# Allegro board HI2XXDK.brd
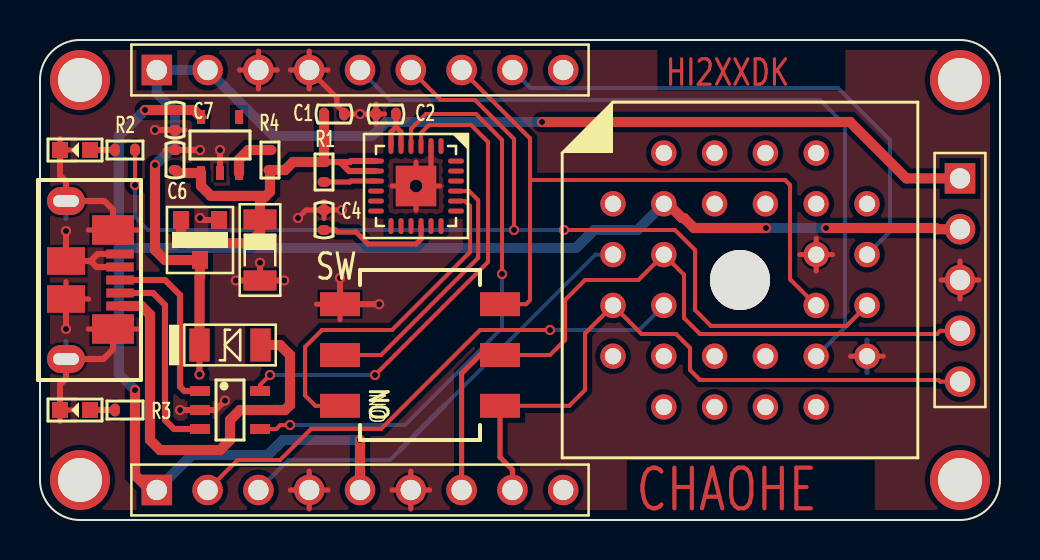
[diagram p0: board, top side]
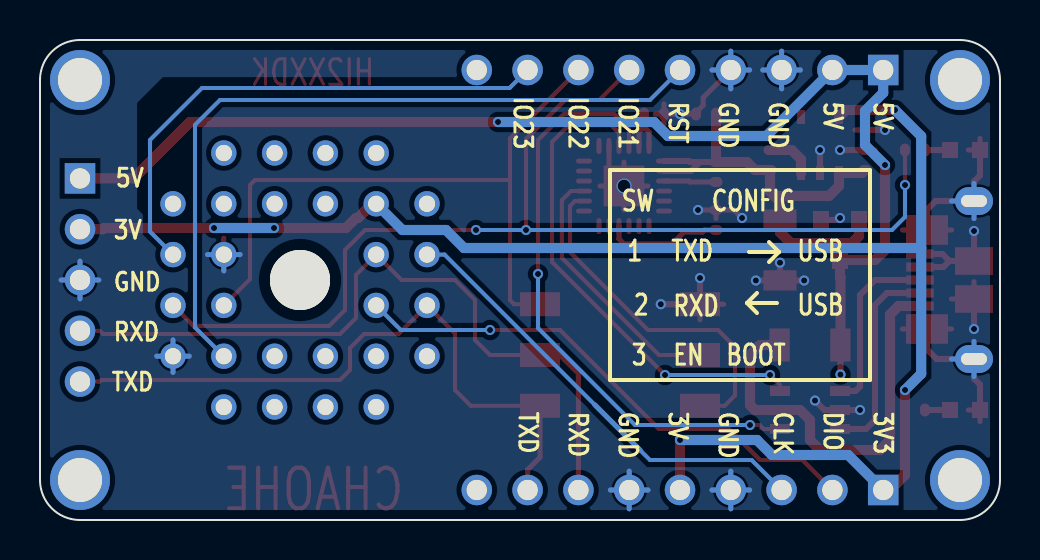
[diagram p1: board, bottom side, seen from below]

Outline 48 x 24 mm; copper layers: TOP, BOTTOM. Coordinates in mm from the lower left corner of the outline.
Outline path: 0,22 arc(0.59,23.41) 2,24 46,24 arc(47.41,23.41) 48,22 48,2 arc(47.41,0.59) 46,0 2,0 arc(0.59,0.59) 0,2 0,22

## Placement (name value [footprint] x y rotation side)
C1  4.7uF  [C0402_OB]  14.7 20.3 180 top
C2  0.1uF  [C0402_OB]  17.3 20.3 0 top
C4  4.7uF  [C0402_OB]  14.2 15 270 top
C5  10uF  [SC1206]  11 13.5 270 top
C6  0.1uF  [C0402_OB]  6.75 18 90 top
C7  1uF  [C0402_OB]  6.75 20 90 top
D1  1N5819  [SD1206]  9.5 8.75 0 top
D2  GREEN  [D0603]  1.75 18.5 180 top
D4  RED  [D0603]  1.75 5.5 180 top
H1  HOLE  [HOLE-2-MM]  46 2 0 top
H2  HOLE  [HOLE-2-MM]  2 22 0 top
H3  HOLE  [HOLE-2-MM]  46 22 0 top
H4  HOLE  [HOLE-2-MM]  2 2 0 top
J1  MINI-USB  [MICRO-USB-B-1051640001]  4 12 0 top
J2  PLCC28  [PLCC28_DIP]  35 12 0 top
J3  CONN PLUG 5  [HEADER1X5-2_54MM]  46 12 270 top
J5  HEADER 9  [HEADER1X9-2_54MM]  16 22.5 0 top
J6  HEADER 9  [HEADER1X9-2_54MM]  16 1.5 0 top
R1  4.7K  [R0402_OB]  14.2 17.4 90 top
R2  330R  [R0402_OB]  4.25 18.5 180 top
R3  330R  [R0402_OB]  4.25 5.5 180 top
R4  4.7K  [R0402_OB]  11.5 18 270 top
SW1  SW DIP-3  [SW_SMD_3P]  19 8.25 90 top
U1  CP2104  [QFN-24_4X4MM_P0_5]  18.8 16.7 270 top
U2  USBLC6-2SC6  [SOT23-6-0_95]  9.5 5.5 270 top
U3  AP2331TD  [SOT23-3-0_95]  8 14 180 top
U4  XC6210-3.0  [SOT23-5-0_95]  9 18.75 0 top

## Library data of the parts
C1 C2 C4-C7 = Capacity_Nonpolarity
D1 = diode
D2 D4 = LED
H1-H4 = HOLE
J1 = MICRO-USB_B
J2 = PLCC28_DIP
J3 = CONN PLUG 5
J5 J6 = HEADER 9
R1-R4 = Res
SW1 = SW DIP-3
U1 = CP2104
U2 = USBLC6-2SC6
U3 = AP2331TD
U4 = XC6210

## Footprints (pads in the part's own frame, mm; a bottom-side part is the same pattern mirrored in y, then rotated)
C0402_OB
  oval 0.5x0.65 smd: 1(-0.5,0) 2(0.5,0)
D0603
  rect 0.8x0.8 smd: 1(-0.75,0) 2(0.75,0)
HEADER1X5-2_54MM
  rect 1.524x1.524 hole 1.016: 1(-5.08,0)
  round 1.524 hole 1.016: 2(-2.54,0) 3(0,0) 4(2.54,0) 5(5.08,0)
HEADER1X9-2_54MM
  rect 1.524x1.524 hole 1.016: 1(-10.16,0)
  round 1.524 hole 1.016: 2(-7.62,0) 3(-5.08,0) 4(-2.54,0) 5(0,0) 6(2.54,0) 7(5.08,0) 8(7.62,0) 9(10.16,0)
HOLE-2-MM
  round 3 hole 2.2: 1(0,0)
MICRO-USB-B-1051640001
  rect 1.38x0.45 smd: 1(0,-1.3) 2(0,-0.65) 3(0,0) 4(0,0.65) 5(0,1.3)
  rect 2.1x1.475 smd: 6(-0.35,-2.45) 9(-0.35,2.5)
  oval 1.9x1.4 hole 1.3x0.6: 7(-2.7,3.95) 8(-2.7,-3.95)
  rect 1.9x1.375 smd: 10(-2.7,-0.95) 11(-2.7,0.95)
PLCC28_DIP
  round 3 hole 3.6 unplated: (0,0)
  round 1.27 hole 0.813: 1(1.27,3.81) 2(-1.27,6.35) 3(-1.27,3.81) 4(-3.81,6.35) 5(-6.35,3.81) 6(-3.81,3.81) 7(-6.35,1.27) 8(-3.81,1.27) 9(-6.35,-1.27) 10(-3.81,-1.27) 11(-6.35,-3.81) 12(-3.81,-6.35) 13(-3.81,-3.81) 14(-1.27,-6.35) 15(-1.27,-3.81) 16(1.27,-6.35) 17(1.27,-3.81) 18(3.81,-6.35) 19(6.35,-3.81) 20(3.81,-3.81) 21(6.35,-1.27) 22(3.81,-1.27) 23(6.35,1.27) 24(3.81,1.27) 25(6.35,3.81) 26(3.81,6.35) 27(3.81,3.81) 28(1.27,6.35)
QFN-24_4X4MM_P0_5
  oval 0.8x0.25 smd: 1(-2,1.25) 2(-2,0.75) 3(-2,0.25) 4(-2,-0.25) 5(-2,-0.75) 6(-2,-1.25) 13(2,-1.25) 14(2,-0.75) 15(2,-0.25) 16(2,0.25) 17(2,0.75) 18(2,1.25)
  oval 0.25x0.8 smd: 7(-1.25,-2) 8(-0.75,-2) 9(-0.25,-2) 10(0.25,-2) 11(0.75,-2) 12(1.25,-2) 19(1.25,2) 20(0.75,2) 21(0.25,2) 22(-0.25,2) 23(-0.75,2) 24(-1.25,2)
  rect 2.032x2.032 smd: 25(0,0)
R0402_OB
  oval 0.5x0.65 smd: 1(-0.5,0) 2(0.5,0)
SC1206
  rect 1.016x1.651 smd: 1(-1.524,0) 2(1.524,0)
SD1206
  rect 1.016x1.651 smd: 1(1.524,0) 2(-1.524,0)
SOT23-3-0_95
  rect 0.8x0.9 smd: 1(-0.95,-1) 2(0.95,-1) 3(0,1)
SOT23-5-0_95
  rect 0.4x0.7 smd: 1(-0.95,-1.4) 2(0,-1.4) 3(0.95,-1.4) 4(0.95,1.4) 5(-0.95,1.4)
SOT23-6-0_95
  rect 0.5x1 smd: 1(-0.95,-1.5) 2(0,-1.5) 3(0.95,-1.5) 4(0.95,1.5) 5(0,1.5) 6(-0.95,1.5)
SW_SMD_3P
  rect 1.2x2 smd: 1(-2.54,-4) 2(0,-4) 3(2.54,-4) 4(2.54,4) 5(0,4) 6(-2.54,4)

## Nets
GND: C1.1 C2.1 C4.1 C5.2 C6.2 C7.1 D2.2(-) D4.2(-) J1.4(ID) J1.5(GND) J1.6 J1.7 J1.8 J1.9 J1.10 J1.11 J2.19 J2.24 J3.3 J5.3 J5.4 J6.4 J6.6 SW1.4(B3) U1.2(GND) U1.25(EPD) U2.2(GND) U3.1(GND) U4.2(VSS)
VBUS: D1.1(P) J1.1(VBUS) U2.5(VBUS)
VCC: D1.2(N) J3.1 J5.1 J5.2 U3.3(IN)
CP2104_RXD: SW1.6(B1) U1.20(RXD)
CP2104_TXD: SW1.5(B2) U1.21(TXD)
DP3V3: C7.2 J2.6 J3.2 J6.1 J6.5 R3.1 U4.5(VOUT)
DP5V: C1.2 C5.1 C6.1 R1.2 R4.2 U1.7(REGIN) U1.8(VBUS) U3.2(OUT) U4.1(VIN)
IO1: J2.1
IO2: J2.2
IO3: J2.3
IO4: J2.4
IO5: J2.5
IO7(SWCLK): J2.7 J6.3
IO8(MCU_RXD): J2.8 J3.4 J6.7 SW1.2(A2)
IO9(MCU_TXD): J2.9 J3.5 J6.8 SW1.1(A1)
IO10(SWDIO): J2.10 J6.2
IO11: J2.11
IO12: J2.12
IO13: J2.13
IO14: J2.14
IO15: J2.15
IO16: J2.16
IO17: J2.17
IO18: J2.18
IO20(RESET): J2.20 J5.5
IO21: J2.21 J5.6 R2.1
IO22: J2.22 J5.7 SW1.3(A3)
IO23: J2.23 J5.8
IO25: J2.25
IO26: J2.26
IO27: J2.27
IO28: J2.28
USB_DN: U1.4(D-) U2.4(IO2#4)
USB_DP: U1.3(D+) U2.6(IO1#6)
N02222: C2.2 U1.5(VIO) U1.6(VDD)
N02371: C4.2 U1.16(VPP)
N03180: R1.1 U1.9(R\S\T\)
N03555: D2.1(+) R2.2
N94151: D4.1(+) R3.2
N576722: J1.3(DP) U2.1(IO1#1)
N576726: J1.2(DN) U2.3(IO2#3)
N579280: R4.1 U4.3(CE)

Pads without a net: H1 1; H2 1; H3 1; H4 1; J5 9; J6 9; U1 1 10 11 12 13 14 15 17 18 19 22 23 24; U4 4

## Via types
v1: diameter 0.508, hole 0.305, TOP to BOTTOM, 32 vias
v2: diameter 0.762, hole 0.635, TOP to BOTTOM, 1 via

## Routing (per net, layer and track width the routed paths; a pad name or vN(x,y) marks a point on that pad's centre or on a via; arc(x,y) is an arc through that point)
GND: length 116.5
  TOP w0.254: 6.25,18.5 C6.2 6.75,18.93 ; C2.1 16.8,20.8 ; C2.1 v1(16,20.3) C1.1 15.2,20.37 14.84,20.73 14.84,21.12 J5.4 ; C2.1 17.23,20.3 ; C2.1 16.8,19.8 ; 1.58,5.5 D4.2 1,4.92 ; 18.54,0.56 J6.6 ; J6.6 17.6,1.5 ; J6.6 19.48,1.5 ; J6.6 18.54,2.44 ; 6.75,19.07 C7.1 7.25,19.5 ; 1.3,11.92 J1.10 2.43,11.05 ; 10.92,21.56 J5.3 ; J5.3 11.86,22.5 ; J5.3 9.98,22.5 ; J5.3 10.92,23.44 ; 14.2,15.07 C4.1 ; C4.1 14.2,15.93 ; C4.1 v1(15.1,15.5) ; C4.1 13.3,15.5 v1(12.9,15.1) ; 40.54,8.19 J2.19 42.16,8.19 ; 38.81,12.46 J2.24 ; J2.24 38.81,14.08 ; J2.24 38,13.27 ; J2.24 39.62,13.27 ; J5.4 13.46,23.44 ; J5.4 13.46,21.56 ; J5.4 12.52,22.5 ; J5.4 14.4,22.5 ; J6.4 14.4,1.5 ; J6.4 13.46,2.44 ; J6.4 13.46,0.56 ; J6.4 12.52,1.5 ; 4.88,9.55 J1.6 2.42,9.55 ; v2(18.8,16.7) 19.99,16.7 ; v2(18.8,16.7) 18.8,15.51 ; v2(18.8,16.7) 18.8,17.89 ; v2(18.8,16.7) 19.55,17.45 U1.2 ; v2(18.8,16.7) 17.61,16.7 ; J3.3 46.94,12 ; J3.3 46,12.94 ; J3.3 45.06,12 ; J3.3 46,11.06 ; 15,10.01 SW1.4 13.82,10.79 ; 1.58,18.5 D2.2 1,19.08 ; 4.88,14.5 J1.9 2.42,14.5
  TOP w0.305: C6.2 v1(8,18.5) ; C5.2 v1(12.21,11.98) ; C5.2 v1(11,12.86) ; C5.2 v1(9.79,11.98) ; J1.6 3.65,8.53 3.17,8.05 J1.8 1.3,7.07 1,6.77 D4.2 ; U3.1 8.1,15 v1(8,15.1) ; J1.4 2.83,12.65 2.53,12.95 ; U4.2 v1(9,18.5) ; C7.1 v1(5.75,19.5) ; 2.53,12.95 J1.11 v1(1.3,14.45) ; 2.53,12.95 2.88,13.3 J1.5 ; v1(15,12.1) SW1.4 v1(16.96,10.79) ; v1(9.25,5.97) 8.78,5.5 U2.2 v1(7,5.5) ; D2.2 1,17.23 1.3,16.93 J1.7 3.22,15.95 3.65,15.52 J1.9 ; J1.10 v1(1.3,9.55)
  BOTTOM w0.254: J5.3 11.86,22.5 ; J5.3 9.98,22.5 ; J5.3 10.92,23.44 ; J5.3 10.92,21.56 ; J6.6 19.48,1.5 ; J6.6 17.6,1.5 ; J6.6 18.54,2.44 ; J6.6 18.54,0.56 ; 1.3,15.07 J1.7 ; J1.7 1.3,16.83 ; J1.7 2.43,15.95 ; 40.54,8.19 J2.19 ; J2.19 41.35,7.38 ; J2.19 42.16,8.19 ; J2.19 41.35,9 ; 45.06,12 J3.3 ; J3.3 46,12.94 ; J3.3 46,11.06 ; J3.3 46.94,12 ; J6.4 13.46,2.44 ; J6.4 12.52,1.5 ; J6.4 13.46,0.56 ; J6.4 14.4,1.5 ; 38,13.27 J2.24 ; J2.24 38.81,12.46 ; J2.24 39.62,13.27 ; J5.4 13.46,23.44 ; J5.4 14.4,22.5 ; J5.4 13.46,21.56 ; J5.4 12.52,22.5 ; J1.8 2.43,8.05 ; J1.8 1.3,8.93 ; J1.8 1.3,7.17
VBUS: length 20.9
  TOP w0.508: D1.1 12,8.75 12.5,8.25 12.5,5.75 12.25,5.5 U2.5 10,5.5 9.5,5 9.5,4 9,3.5 6,3.5 5.5,4 5.5,10.27 5.07,10.7 J1.1
VCC: length 61
  TOP w0.305: D1.2 v1(7.98,7.27)
  TOP w0.508: v1(5.75,17.75) 5.75,13.5 6.25,13 U3.3 8,12.17 7.98,12.15 D1.2 ; v1(25.1,19.9) 40.5,19.9 43.32,17.08 J3.1
  BOTTOM w0.508: v1(5.75,17.75) 6.75,18.75 6.75,20.45 5.84,21.36 J5.1 J5.2 11.68,19.2 16.6,19.2 17.3,19.9 v1(25.1,19.9)
CP2104_RXD: length 17.7
  TOP w0.203: U1.20 21.25,15.95 21.5,15.7 21.5,13.4 17.6,9.5 14.1,9.5 13.25,8.65 13.25,6.23 13.77,5.71 SW1.6
CP2104_TXD: length 13.1
  TOP w0.203: SW1.5 17.05,8.25 21.91,13.11 21.91,15.99 21.45,16.45 U1.21
DP3V3: length 80.7
  TOP w0.508: J6.5 v1(16,4) ; v1(36.3,14.6) 32.7,14.6 32.2,15.1 32.1,15.1 31.39,15.81 J2.6 ; J3.2 44.86,14.54 44.8,14.6 v1(39.3,14.6) ; J6.1 5.5,1.5 4.75,2.25 R3.1 v1(4.75,6.5) ; v1(5.25,20.5) C7.2 7.7,20.5 U4.5
  BOTTOM w0.508: J6.1 7.59,3.25 11.4,3.25 12.15,4 v1(16,4) ; 3.94,13.6 3.94,19.19 v1(5.25,20.5) ; 3.94,13.6 3.94,7.31 v1(4.75,6.5) ; 3.94,13.6 26.8,13.6 27.7,14.5 29.88,14.5 J2.6 ; v1(36.3,14.6) v1(39.3,14.6)
DP5V: length 23.8
  TOP w0.305: 15,17.9 R1.2 ; 15,17.9 15.5,17.9 15.55,17.95 U1.7 ; 15,17.9 15.45,17.45 U1.8
  TOP w0.508: 11.29,16.21 11,15.91 C5.1 11,14.39 10.46,13.84 7.41,13.84 7.05,14.2 U3.2 ; 11.29,16.21 11.5,16.41 R4.2 12.25,17.5 12.65,17.9 R1.2 C1.2 ; 11.29,16.21 8.54,16.21 8.05,16.7 U4.1 6.9,17.35 C6.1
IO7(SWCLK): length 22.6
  BOTTOM w0.203: 20.25,5.75 27.77,13.27 J2.7 ; 18,3.5 17.5,3 12.42,3 J6.3
  BOTTOM w0.254: 18,3.5 20.25,5.75
IO8(MCU_RXD): length 37.4
  TOP w0.203: J3.4 45.01,9.46 44.85,9.3 33,9.3 32.2,10.1 32.2,12.26 J2.8 29.92,12 27.25,12 26.25,11 26.25,9 25.5,8.25 SW1.2
  TOP w0.254: J6.7 21.08,7.33 22,8.25 SW1.2
IO9(MCU_TXD): length 33.4
  TOP w0.203: SW1.1 26.46,5.71 27.25,6.5 27.25,9.33 J2.9 30.08,9.3 31.8,9.3 32.5,8.6 32.5,7.5 33,7 44.93,7 45.01,6.92 J3.5
  TOP w0.254: J6.8 23.62,2.52 23,3.14 SW1.1
IO10(SWDIO): length 26.6
  TOP w0.203: J6.2 9.88,3 12,3 13.56,4.56 17.06,4.56 22,9.5 v1(25.5,9.5)
  BOTTOM w0.203: J2.10 29.96,9.5 v1(25.5,9.5)
IO20(RESET): length 37.5
  BOTTOM w0.203: J5.5 17.5,21 39,21 40.25,19.75 40.25,9.63 J2.20
IO21: length 55.5
  TOP w0.203: J2.21 40.33,9.71 33.54,9.71 32.75,10.5 32.75,13.5 31.75,14.5 v1(26.2,14.5) ; v1(4.75,16.75) R2.1 ; J5.6 20.04,21 21.75,21 23.7,19.05 v1(23.7,14.5)
  BOTTOM w0.203: v1(26.2,14.5) v1(23.7,14.5) 5.4,14.5 4.75,15.15 v1(4.75,16.75)
IO22: length 34.2
  TOP w0.203: 24.5,17 37.25,17 37.5,16.75 37.5,12.04 J2.22 ; 24.5,17 24.5,19.08 J5.7 ; 24.5,17 24.5,10.99 24.3,10.79 SW1.3
IO23: length 26.5
  BOTTOM w0.203: J5.8 24.52,21.6 39.9,21.6 42.5,19 42.5,14.42 J2.23
USB_DN: length 29.8
  TOP w0.203: v1(12.5,4.75) 12.02,4.75 11.82,4.55 U2.4 ; U1.4 18.55,19.55 19.3,20.3 21.8,20.3 23.1,19 v1(23.1,12.3)
  BOTTOM w0.203: v1(23.1,12.3) 23.1,9.6 18.25,4.75 v1(12.5,4.75)
USB_DP: length 24.8
  TOP w0.203: v1(16.75,7.25) 22.4,12.9 22.4,18.9 21.55,19.75 19.45,19.75 19.05,19.35 U1.3 ; v1(11.5,7.25) 11,6.75 U2.6
  BOTTOM w0.203: v1(16.75,7.25) v1(11.5,7.25)
N02222: length 2.8
  TOP w0.254: 17.8,19.65 17.55,19.4 U1.6 ; 17.8,19.65 C2.2 ; 17.8,19.65 18.05,19.4 U1.5
N02371: length 5.9
  TOP w0.254: U1.16 19.05,14.05 18.8,13.8 16.4,13.8 15.8,14.4 14.88,14.4 14.78,14.5 C4.2
N03180: length 2.6
  TOP w0.254: U1.9 15.55,16.95 15.5,16.9 R1.1
N03555: length 1.2
  TOP w0.305: D2.1 R2.2
N94151: length 1.2
  TOP w0.305: D4.1 R3.2
N576722: length 9
  TOP w0.305: U2.1 7.22,6.45 7,6.67 7,11.25 6.25,12 J1.3
N576726: length 10.2
  TOP w0.305: U2.3 6.7,4.55 6.25,5 6.25,10.75 5.65,11.35 J1.2
N579280: length 2.4
  TOP w0.508: U4.3 9.95,18.03 10.42,18.5 R4.1

## Copper pours and planes (outline as drawn; the poured copper is in the pictures)
GND on TOP: 0.5,1.9 0.5,22 2,23.5 46,23.5 47.5,22 47.5,2 46,0.5 1.9,0.5 ; 20 cut-outs
GND on BOTTOM: 0.5,2 0.5,22 2,23.5 46,23.5 47.5,22 47.5,2 46,0.5 2,0.5 ; 4 cut-outs

## Text on the board
Ref Des/Silkscreen Bottom: 5V | 3V | GND | RXD | TXD | 3V3 | DIO | CLK | RST | IO21 | IO22 | IO23 | USB | CONFIG | EN  BOOT | 2 | 3 | SW | 1
TOP: HI2XXDK | CHAOHE
Board Geometry/Soldermask Top: HI2XXDK | CHAOHE
Ref Des/Silkscreen Top: ON | SW
COMPVAL_TYPE_TOP: FIGURE | SIZE | 12.0 | 20.0 | 21.654 | 40.0 | 86.61 | 141.732 | 59.055x23.622 | 70.866x23.622 | DRILL CHART: TOP to BOTTOM | ALL UNITS ARE IN MILS | PLATED | NON-PLATED | QTY | 47 | 3 | 28 | 32 | 4 | 1 | 2
